# Altium PCB buzz_pump_led.PcbDoc
Units mil, origin at the board's own origin, x right, y up, seen from the top; angles counter-clockwise.
Board outline 3937.01 x 3937.01 mil, 2 copper layers (Top Layer, Bottom Layer); 59 components, 31 nets, 139 pads, 57 vias.
Unrouted connection lines stored in the file: 41.
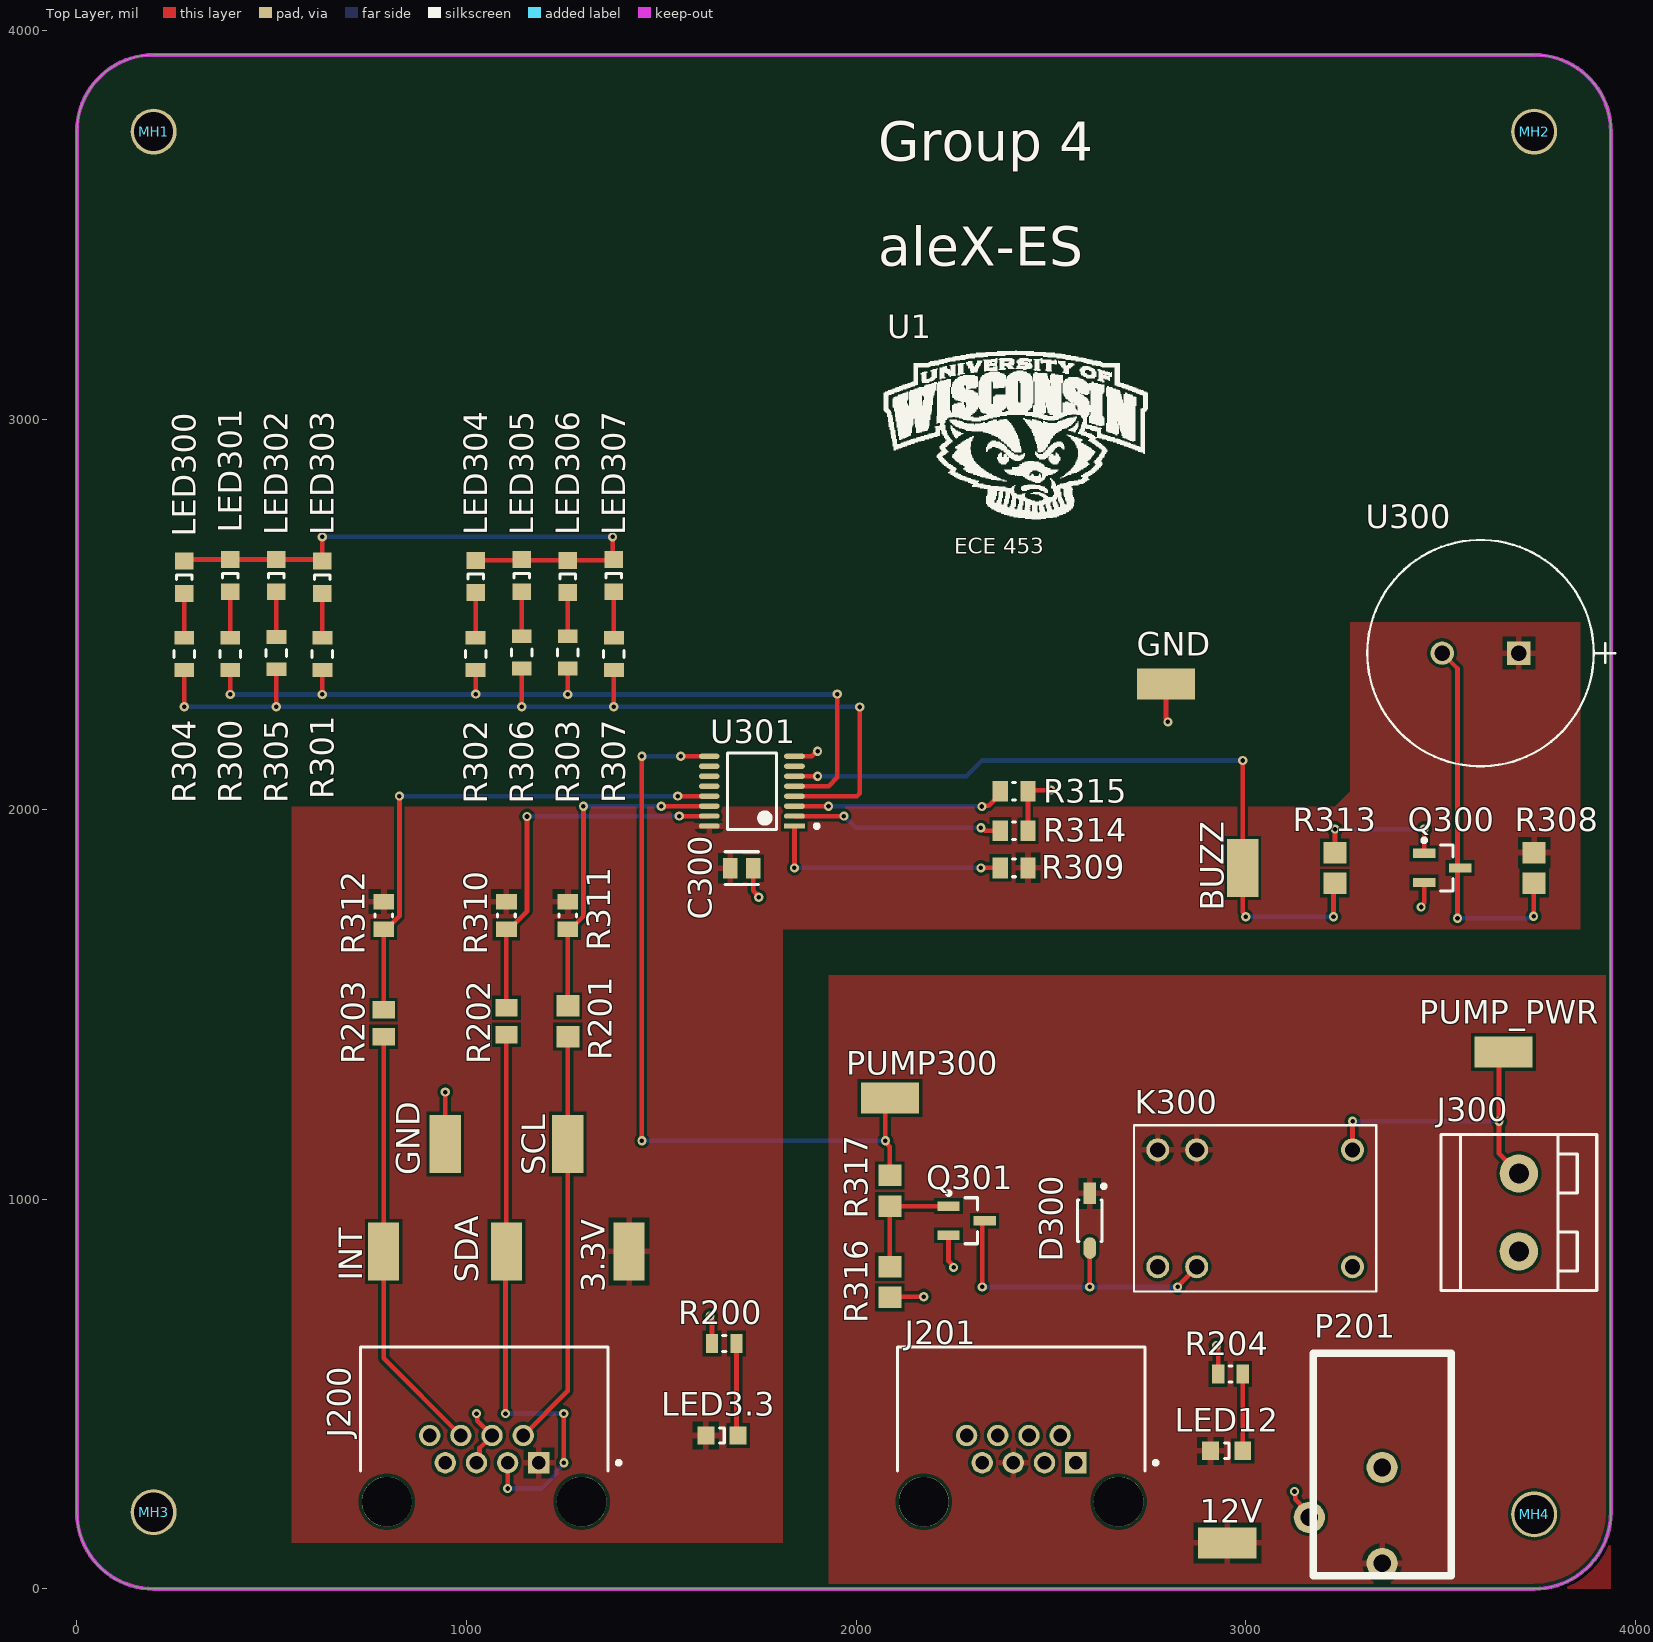
[diagram p0: Top Layer view]
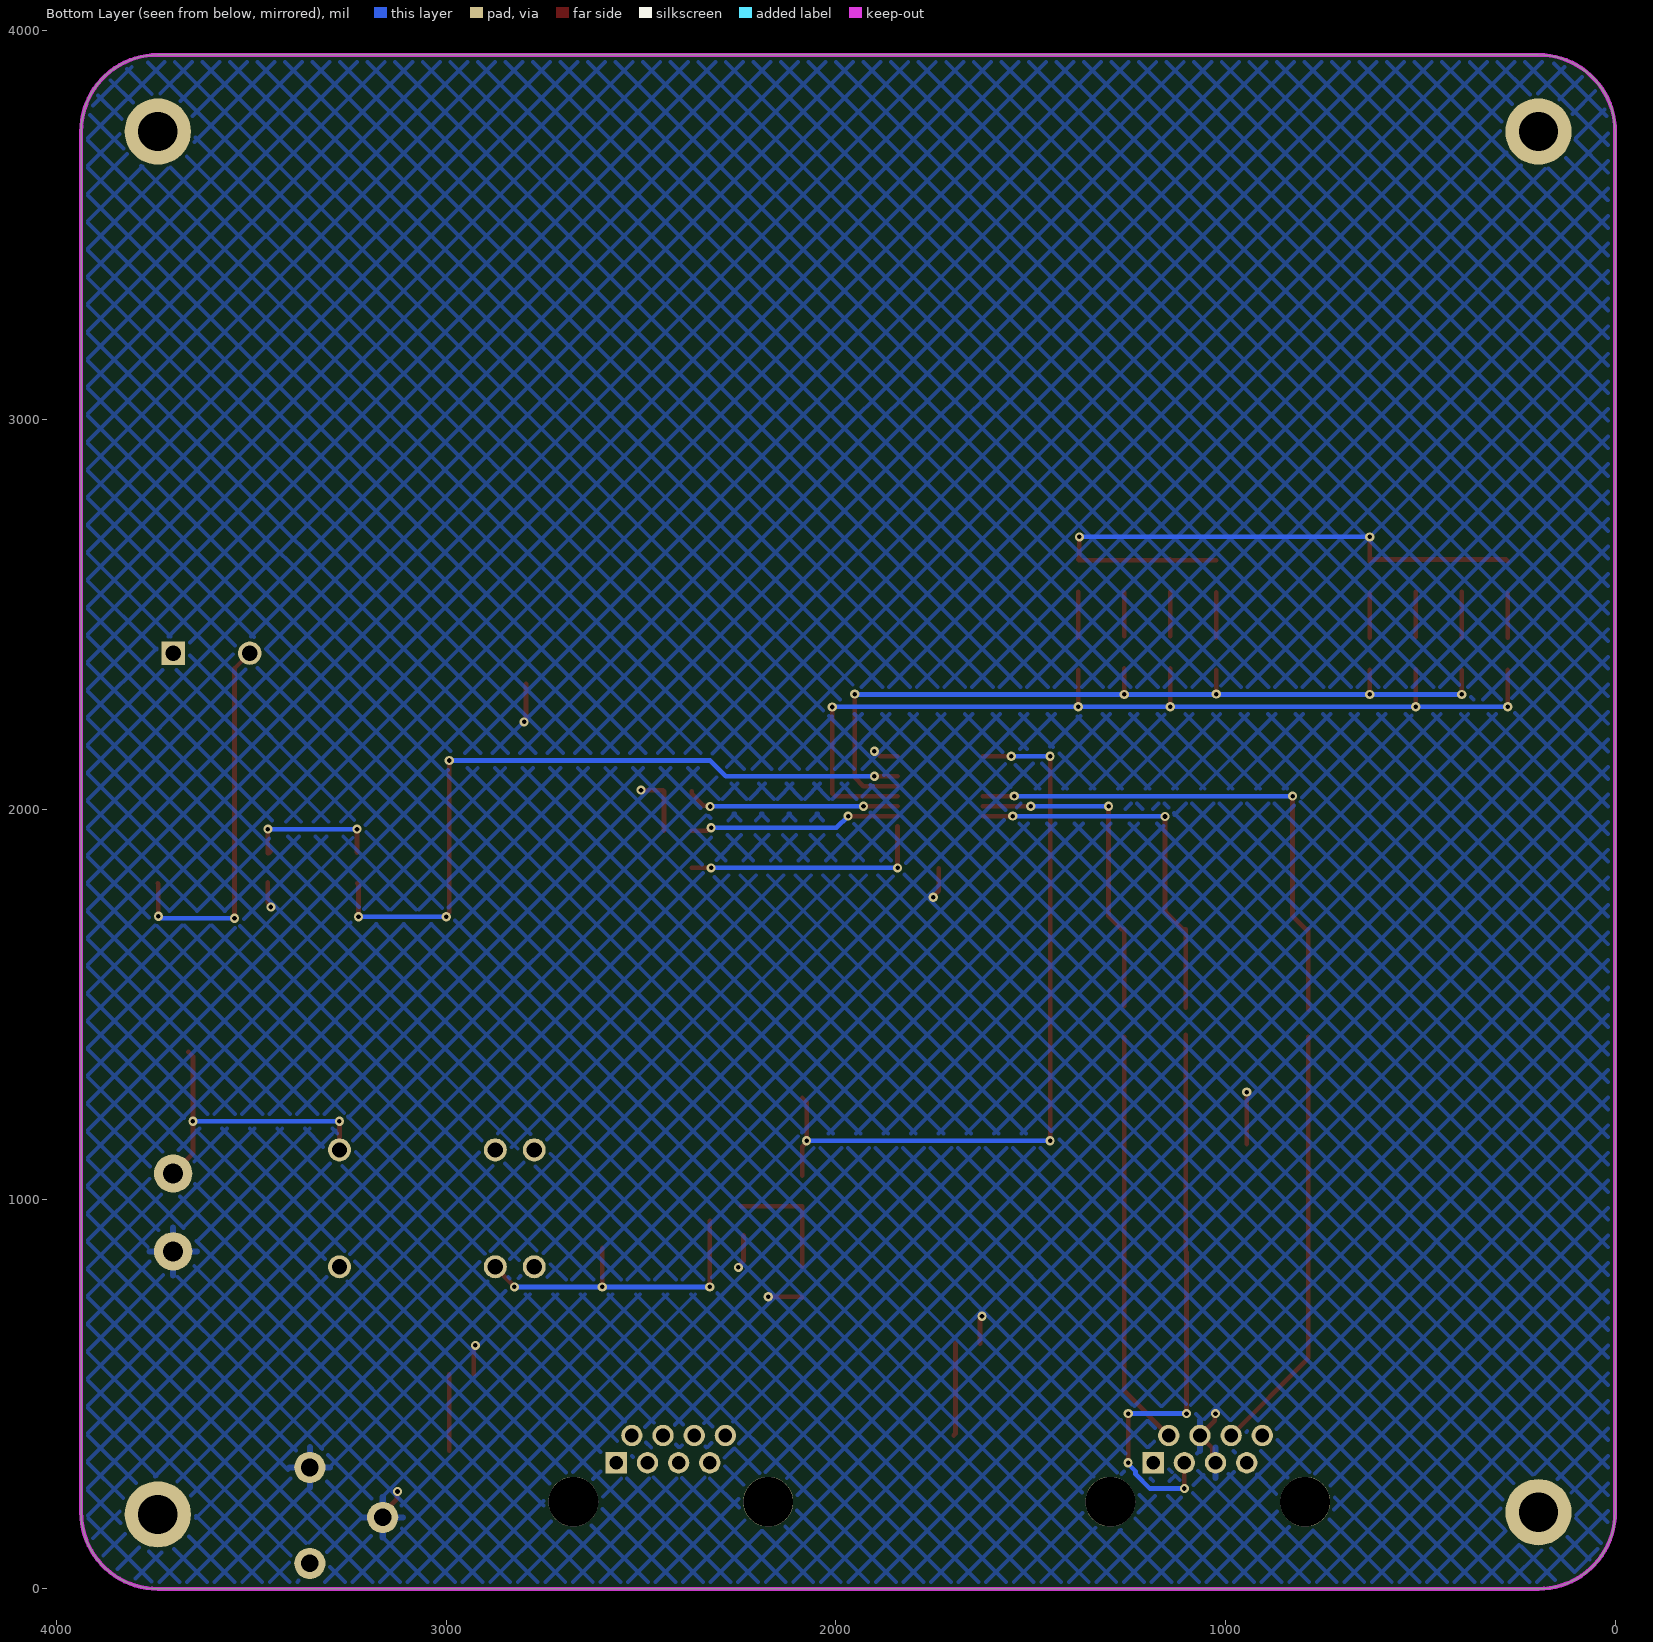
[diagram p1: Bottom Layer view, seen from below]
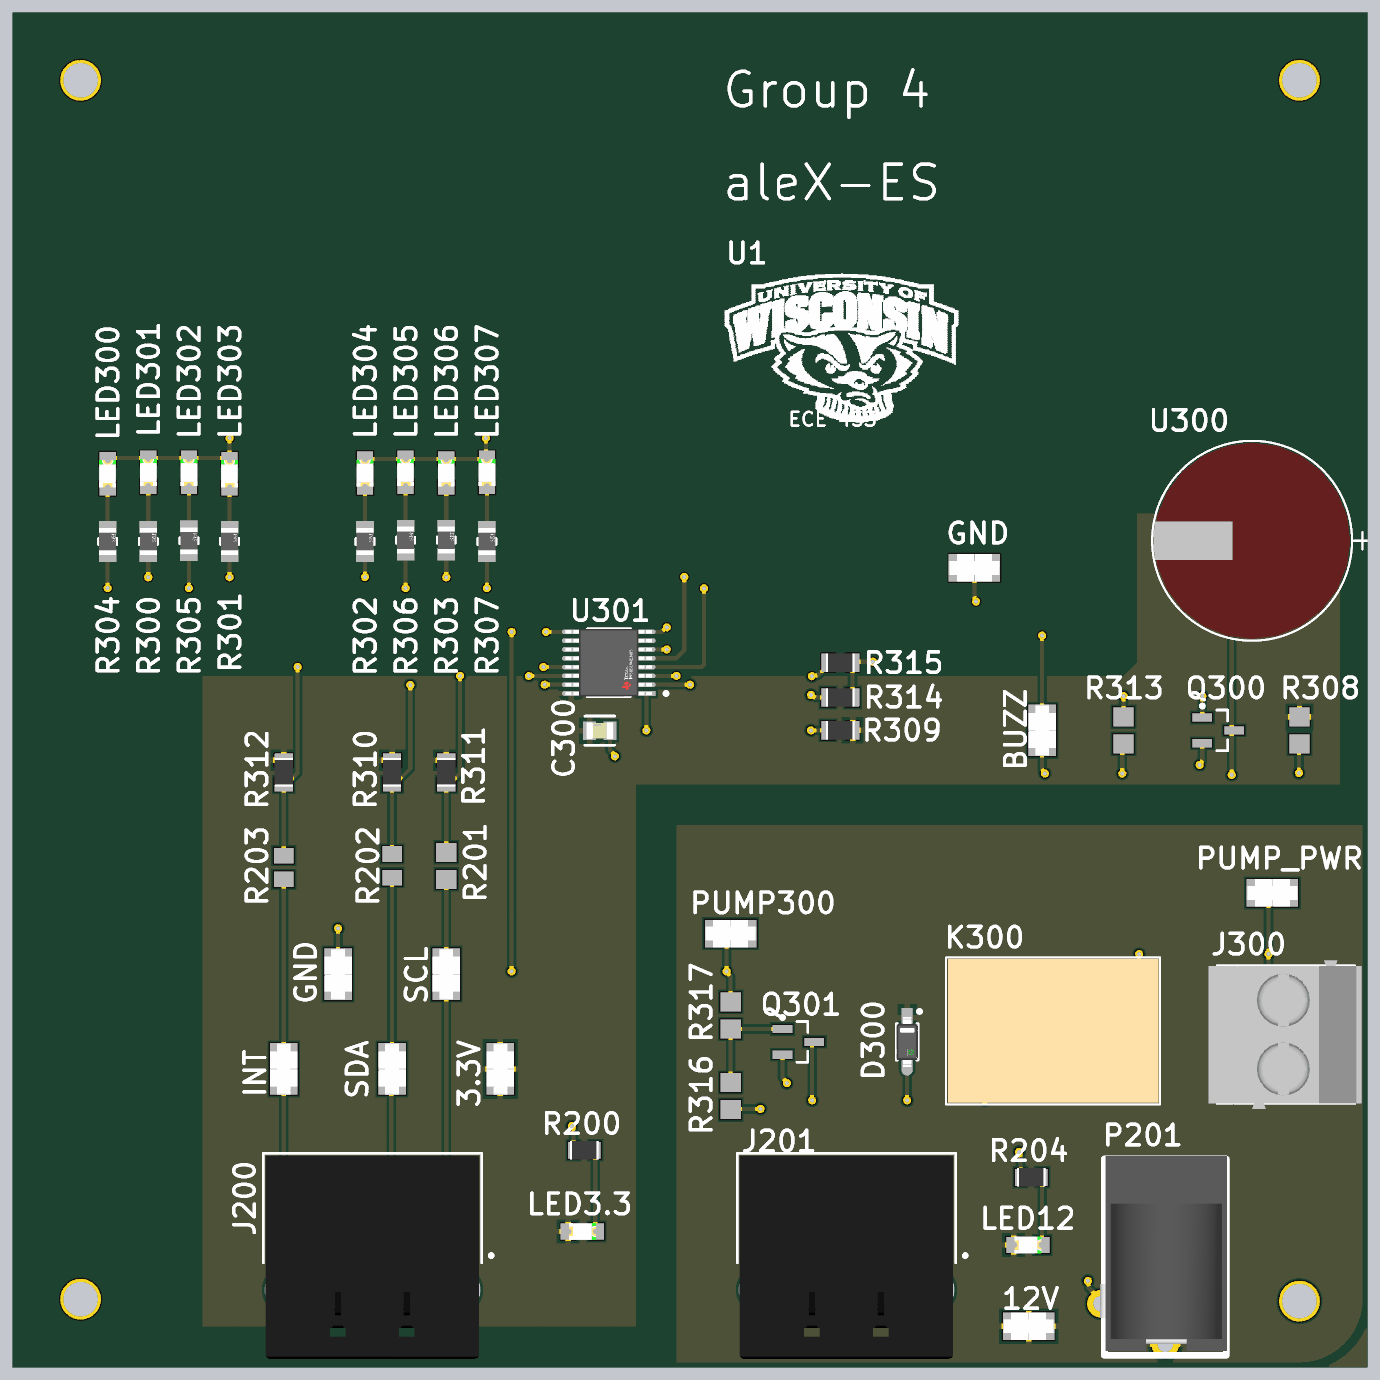
[diagram p2: 3D render of the assembled board from above, using the file's embedded part models]

## Layer stack, top to bottom
Top Solder: solder mask 0.4, Solder Resist, Dk 3.5
Top Layer: signal copper 1.4
Dielectric1: dielectric 12.6, FR-4, Dk 4.8
Bottom Layer: signal copper 1.4
Bottom Solder: solder mask 0.4, Solder Resist, Dk 3.5

## Board outline
0,196.85 ccw(c196.85,196.85) 196.85,0 3740.16,0 ccw(c3740.16,196.85) 3937.01,196.85 3937.01,3740.16 ccw(c3740.16,3740.16) 3740.16,3937.01 196.85,3937.01 ccw(c196.85,3740.16) 0,3740.16

## Design rules (kind name [scope] priority, off if disabled: settings)
Clearance Polygon_Clearance [All vs InPolygon] p1: gap=7.87 ignorepadtopadclearanceinfootprint=FALSE
Clearance [All] p2: gap=7.87 ignorepadtopadclearanceinfootprint=TRUE
ComponentClearance [InComponent('U3')] p1: gap=0 collisioncheckmode=3 verticalgap=10 showdistances=FALSE
Height [All] p1: minheight=0 maxheight=2952.76 prefheight=500
HoleSize [All] p1: absolutevalues=TRUE maxlimit=250 minlimit=11.81 maxpercent=80.000 minpercent=20.000
MinimumAnnularRing [All] p1: minimumring=5.91
MinimumSolderMaskSliver [All] p1: minsoldermaskwidth=8.66
NetAntennae NetAntennae_5.0V [InNet('5.0V')] p1: netantennaetolerance=0
NetAntennae NetAntennae_3.3V [InNet('3.3V')] p2: netantennaetolerance=0
PlaneClearance [All] p1: clearance=11.81
PlaneConnect [All] p1: planeconnectstyle=Relief reliefexpansion=11.81 reliefentries=4 reliefconductorwidth=11.81 reliefairgap=11.81
PolygonConnect ViaConnect [All vs IsVia] p1: connectstyle=Direct reliefconductorwidth=15 reliefentries=4 polygonreliefangle="90 Angle" airgapwidth=10
PolygonConnect [All] p2: connectstyle=Relief reliefconductorwidth=15.75 reliefentries=4 polygonreliefangle="90 Angle" airgapwidth=11.81
RoutingVias [All] p1: holewidth=11.81 width=23.62 viastyle="Through Hole" minholewidth=11.81 minwidth=23.62 maxholewidth=196.85 maxwidth=393.7
SilkToSilkClearance [All] p1: silktosilkclearance=0
SilkToSolderMaskClearance [IsPad] p1: minsilkscreentomaskgap=0 clearancetoexposedcopper=TRUE
SolderMaskExpansion [All] p1: expansion=4 istentingtop=FALSE
UnConnectedPin [All] p1:
Width [All] p1: maxlimit=393.7 minlimit=7.87 preferedwidth=23.62
21 further rules are at their usual default settings.

## Classes and differential pairs
component class 04_Mechanical: MH1 MH2 MH3 MH4 U1

## Components (designator, comment, footprint, x,y, rotation, side; value= is the part's Value field where it differs from the comment)
3.3V "5019" KSTN-5019_V 1417.32,866.14 r90 top (schematic designator 200)
12V "5019" KSTN-5019_V 2952.76,118.11 r0 top (schematic designator 201)
BUZZ "5019" KSTN-5019_V 2992.13,1850.39 r90 top (schematic designator BUZZ300)
C300 "C0805C104K5RACTU" FP-C0805C-DN-MFG 1706.31,1849.61 r0 top value=100nF
D300 "SM5817PL-TP" On_Semiconductor_425-04_IPC_A 2599.68,944.88 r270 top
GND "5019" KSTN-5019_V 2795.28,2322.83 r180 top
GND "5019" KSTN-5019_V 945.51,1141.73 r90 top (schematic designator GND200)
INT "5019" KSTN-5019_V 787.4,866.14 r90 top (schematic designator INT200)
J200 "RJHSE-5080" FP-RJHSE-5080-MFG 1045.51,318.7 r0 top
J201 "RJHSE-5080" FP-RJHSE-5080-MFG 2423.46,318.7 r0 top
J300 "Pump Power" PHOENIX2X0.2 3700.79,966.14 r90 top
K300 "J1021AS512VDC.45" RELAY6_J102_CRS 3274.02,1126.77 r270 top
LED3.3 "150080GS75000" 0805_A 1655.51,393.7 r180 top (schematic designator LED200)
LED12 "150080GS75000" 0805_A 2950.79,354.33 r180 top (schematic designator LED201)
LED300 "150080RS75000" 0805_A 275.59,2596.46 r270 top
LED301 "150080RS75000" 0805_A 393.7,2600.39 r270 top
LED302 "150080RS75000" 0805_A 511.81,2600.39 r270 top
LED303 "150080RS75000" 0805_A 629.92,2596.46 r270 top
LED304 "150080RS75000" 0805_A 1023.62,2598.43 r270 top
LED305 "150080RS75000" 0805_A 1141.73,2600.39 r270 top
LED306 "150080RS75000" 0805_A 1259.84,2598.43 r270 top
LED307 "150080RS75000" 0805_A 1377.95,2600.39 r270 top
MH1 "MHOLE_2_55MM" MHOLE_2_55MM 196.85,3740.16 r0 top locked
MH2 "MHOLE_2_55MM" MHOLE_2_55MM 3740.16,3740.16 r0 top locked
MH3 "MHOLE_2_55MM" MHOLE_2_55MM 196.85,196.85 r0 top locked
MH4 "MHOLE_2_55MM" MHOLE_2_55MM 3740.16,191.24 r0 top locked
P201 "PJ-102" PJ-102 3350,65.56 r0 top value=CP-102AD
PUMP300 "5019" KSTN-5019_V 2086.61,1259.84 r180 top
PUMP_PWR "5019" KSTN-5019_V 3661.42,1377.95 r0 top (schematic designator PUMP_PWR300)
Q300 "2N3904" SOT-23_M 3503.94,1850.39 r0 top
Q301 "2N3904" SOT-23_M 2283.46,944.88 r0 top
R200 "RC0805FR-07330RL" RESC2013X60X35LL10T20 1661.42,629.92 r180 top value=330R
R201 "ERJ-6GEY0R00V" RES_0805 1259.84,1456.69 r90 top value=0R
R202 "ERJ-6GEY0R00V" RESC2013X70X40NL20T20 1102.36,1456.69 r90 top value=0R
R203 "ERJ-6GEY0R00V" RESC2013X70X40NL20T20 787.4,1451.77 r90 top value=0R
R204 "RC0805FR-07330RL" RESC2013X60X35LL10T20 2960.63,551.18 r180 top value=330R
R300 "RMCF0805JT510R" FP-RMCF0805-MFG 393.7,2399.61 r90 top
R301 "RMCF0805JT510R" FP-RMCF0805-MFG 629.92,2399.61 r90 top
R302 "RMCF0805JT510R" FP-RMCF0805-MFG 1023.62,2399.61 r90 top
R303 "RMCF0805JT510R" FP-RMCF0805-MFG 1259.84,2403.54 r90 top
R304 "RMCF0805JT510R" FP-RMCF0805-MFG 275.59,2399.61 r90 top
R305 "RMCF0805JT510R" FP-RMCF0805-MFG 511.81,2401.57 r90 top
R306 "RMCF0805JT510R" FP-RMCF0805-MFG 1141.73,2403.54 r90 top
R307 "RMCF0805JT510R" FP-RMCF0805-MFG 1377.95,2399.61 r90 top
R308 "10K" RES_0805 3740.16,1850.39 r90 top value=1K
R309 "RC0805FR-0710KL" RESC2013X60X35NL10T20 2405.51,1850.39 r0 top value=10kR
R310 "RC0805FR-0710KL" RESC2013X60X35NL10T20 1102.36,1728.35 r90 top value=10kR
R311 "RC0805FR-0710KL" RESC2013X60X35NL10T20 1259.84,1728.35 r90 top value=10kR
R312 "RC0805FR-0710KL" RESC2013X60X35NL10T20 787.4,1728.35 r90 top value=10kR
R313 "10K" RES_0805 3228.35,1850.39 r90 top value=1K
R314 "RC0805FR-0710KL" RESC2013X60X35NL10T20 2405.51,1945.87 r180 top value=10kR
R315 "RC0805FR-0710KL" RESC2013X60X35NL10T20 2405.51,2047.24 r180 top value=10kR
R316 "10K" RES_0805 2086.61,787.4 r270 top
R317 "10K" RES_0805 2086.61,1021.65 r270 top value=1K
SCL "5019" KSTN-5019_V 1259.84,1141.73 r90 top (schematic designator SCL200)
SDA "5019" KSTN-5019_V 1102.36,866.14 r90 top (schematic designator SDA200)
U1 "Bucky" WalkingBucky 2362.2,2677.17 r0 top
U300 "PS1440P02BT" PS1440P02BT_TDK 3700.79,2401.57 r180 top
U301 "TCA9534PWR" FP-PW0016A-IPC_C 1732.28,2047.24 r180 top

## Footprints (in the part's own frame and the unit in brackets; to place one, negate y for a bottom-side part, rotate by r counter-clockwise, add the part's x,y. Pads: shape width x height; smd on the part's side, far side on the other; paste and mask are expansions set on the pad)
0805_A [mm]
  rect 1.1x1.2 smd: 1(-1.05,0) 2(1.05,0)
  silkscreen extent -0.15,-0.5 0.15,0.5, body extent -1,-0.62 1,0.63, height 0.68
FP-C0805C-DN-MFG [mm]
  rect 0.95x1.35 smd paste+0 mask+0: 1(-0.75,0) 2(0.75,0)
  silkscreen extent -1.1,-1.07 1.1,1.07, body extent -1.4,-0.85 1.4,0.85, height 0.25
FP-PW0016A-IPC_C [mm]
  rect 1.355x0.341 smd paste+0 mask+0: 1(-2.775,2.275)
  rrect100% 1.355x0.341 smd paste+0 mask+0: 2(-2.775,1.625) 3(-2.775,0.975) 4(-2.775,0.325) 5(-2.775,-0.325) 6(-2.775,-0.975) 7(-2.775,-1.625) 8(-2.775,-2.275) 9(2.775,-2.275) 10(2.775,-1.625) 11(2.775,-0.975) 12(2.775,-0.325) 13(2.775,0.325) 14(2.775,0.975) 15(2.775,1.625) 16(2.775,2.275)
  silkscreen extent -4.35,-2.5 1.6,2.5, body extent -3.55,-2.6 3.55,2.6, height 0.25
FP-RJHSE-5080-MFG [mm]
  rect 1.39x1.39 hole 0.89 paste-1000 mask+0: 1(3.556,0.127)
  round 1.39 hole 0.89 paste-1000 mask+0: 2(2.54,1.905) 3(1.524,0.127) 4(0.508,1.905) 5(-0.508,0.127) 6(-1.524,1.905) 7(-2.54,0.127) 8(-3.556,1.905)
  round 3.25 hole 3.25 unplated paste-1000 mask+0: ""(-6.35,-2.413) ""(6.35,-2.413)
  silkscreen extent -8.06,-0.41 8.89,7.68, body extent -8.16,-7.78 8.16,7.78, height 0.25
FP-RMCF0805-MFG [mm]
  rect 0.9x1.3 smd paste+0 mask+0: 1(-1.05,0) 2(1.05,0)
  silkscreen extent -0.23,-0.67 0.23,0.67, body extent -1.6,-0.77 1.6,0.77, height 0.25
KSTN-5019_V [mm]
  rect 3.8x2.03 smd: 1(0,0)
  body extent -1.9,-1.01 1.9,1.02, height 2.29
MHOLE_2_55MM [mm]
  round 3 / inner round 4.572 / far side round 4.318 hole 2.55: 1(0,0)
On_Semiconductor_425-04_IPC_A [mm]
  rect 1.408x0.822 smd paste+0 mask+0: 1(-1.78,0)
  rrect100% 1.408x0.822 smd paste+0 mask+0: 2(1.78,0)
  silkscreen extent -2.37,-0.8 1.35,1.04, body extent -2.98,-1.3 2.98,1.3, height 0.25
PHOENIX2X0.2 [mm]
  round 2.5 hole 1.295: 1(-2.54,0) 2(2.54,0)
  silkscreen extent -5.08,-5.08 5.08,5.08, body extent -5.48,-5.59 5.48,5.71, height 18.05
PJ-102 [mil]
  round 80 hole 45: 1(0,0) 2(0,246.05) 3(-187,118.1)
  silkscreen extent -177,-31 177,539, body extent -190,-20 180,547, height 435
PS1440P02BT_TDK [mil]
  rect 60x60 / inner round 60 / far side rect 60x60 hole 40 paste-30 mask+0: 1(0,0)
  round 60 hole 40 paste-30 mask+0: 2(196.85,0)
  silkscreen extent -247,-290 389,290, body extent -187,-285 385,285, height 336
RELAY6_J102_CRS [mil]
  round 59 / inner round 60 / far side round 59 hole 39 paste-29.5 mask+0: 1(0,0) 2(0,-400) 3(0,-500) 4(300,-500) 5(300,-400) 6(300,0)
  silkscreen extent -63,-561 364,61, body extent -59,-556 359,56, height 457
RES_0805 [mm]
  rect 1.4x1.5 smd: 1(-1,0) 2(1,0)
  body extent -1.07,-0.7 1.07,0.7, height 0.7
RESC2013X60X35LL10T20 [mm]
  rect 0.8x1.25 smd: 1(-0.8,0) 2(0.8,0)
  silkscreen extent -0.1,-0.53 0.1,0.53, body extent -1.05,-0.67 1.05,0.68, height 0.6
RESC2013X60X35NL10T20 [mm]
  rect 1x1.35 smd: 1(-0.9,0) 2(0.9,0)
  silkscreen extent -0.1,-0.58 0.1,0.58, body extent -1.05,-0.68 1.05,0.67, height 0.6
RESC2013X70X40NL20T20 [mm]
  rect 1.15x1.45 smd: 1(-0.875,0) 2(0.875,0)
  body extent -1.1,-0.72 1.1,0.72, height 0.7
SOT-23_M [mm]
  rect 1.45x0.6 smd: 1(-1.175,0.95) 2(-1.175,-0.95) 3(1.175,0)
  silkscreen extent -1.3,-1.5 0.7,1.92, body extent -0.7,-1.5 0.7,1.5, height 1.1
WalkingBucky [mil]
  silkscreen extent -292,69 386,501

## Part data
3.3V 12V BUZZ GND GND INT PUMP300 PUMP_PWR SCL SDA: library part CMP-1672-00008-1, "Test Point, 1 Position SMD, RoHS, Tape and Reel", Manufacturer="Keystone Electronics", Package Quantity=1, Supplier Part Number=59Y8500, Body Material=Bronze, Category=Connectors, ComponentLink1Description=https://datasheet.ciiva.com/14848/m60-2p61-14848437.pdf?src-supplier=Digi-Key, ComponentLink1URL=https://datasheet.ciiva.com/14848/m60-2p61-14848437.pdf?src-supplier=Digi-Key, ComponentLink2Description=https://datasheet.ciiva.com/14848/m60-2p61-14848438.pdf?src-supplier=Digi-Key, ComponentLink2URL=https://datasheet.ciiva.com/14848/m60-2p61-14848438.pdf?src-supplier=Digi-Key, ComponentLink3Description=https://datasheet.ciiva.com/14848/m60-2p61-14848439.pdf?src-supplier=Digi-Key, ComponentLink3URL=https://datasheet.ciiva.com/14848/m60-2p61-14848439.pdf?src-supplier=Digi-Key, ComponentLink4Description=https://datasheet.ciiva.com/16318/m60-2p61-16318395.pdf?src-supplier=Future+Electronics, ComponentLink4URL=https://datasheet.ciiva.com/16318/m60-2p61-16318395.pdf?src-supplier=Future+Electronics, ComponentLink5Description=https://datasheet.ciiva.com/16885/70182998-16885945.pdf?src-supplier=Allied+Electronics, ComponentLink5URL=https://datasheet.ciiva.com/16885/70182998-16885945.pdf?src-supplier=Allied+Electronics, Contact Material=Bronze, Contact Plating=Silver, Height=0.09inch, Lead Free="Lead Free", Manufacturer Part Number=5019, Material=Bronze, Mounting Technology="Surface Mount,PCB", Packaging="Tape and Reel", Pins=1, Plating=Silver, Pricing="1=0.411, 10=0.389, 25=0.285, 50=0.279, 100=0.273, 250=0.246 (USD)", Reach SVHC Compliant=No, RoHS=Yes, RoHS Compliant=Yes, Series=5019, Stock=11269, Supplier=Newark, Termination=SMD/SMT
C300: library part CMP-2007-00279-2, "CAP CER 0.1UF 50V X7R 0805", Case Code (Imperial)=0805, Case Code (Metric)=2012, Dielectric=X7R, Manufacturer=KEMET, Max Operating Temperature=125°C, Min Operating Temperature=-55°C, Package Quantity=4000, Supplier Part Number=19C6015, Tolerance=10%, Voltage=500V, Voltage Rating=50V, Case/Package=0805, Category="Ceramic Capacitors", ComponentLink1Description=https://datasheet.ciiva.com/32431/slceramic-chip-condensers-e-32431755.pdf?src-supplier=Distrelec, ComponentLink1URL=https://datasheet.ciiva.com/32431/slceramic-chip-condensers-e-32431755.pdf?src-supplier=Distrelec, ComponentLink2Description=Datasheet, ComponentLink2URL=https://content.kemet.com/datasheets/KEM_C1003_C0G_SMD.pdf, ComponentLink3Description=https://datasheet.ciiva.com/28682/1851736-28682232.pdf?src-supplier=Element14, ComponentLink3URL=https://datasheet.ciiva.com/28682/1851736-28682232.pdf?src-supplier=Element14, Construction=Flat, Depth=1.25mm, Height=0.9mm, Lead Pitch=0.75mm, Length=2mm, Manufacturer Part Number=C0805C104K5RACTU, Mounting Technology="Surface Mount,PCB", Packaging="Tape and Reel", Pins=2, Pricing="1=0.024, 25=0.024, 50=0.024, 100=0.024, 250=0.024, 500=0.024, 1000=0.024 (USD)", Radiation Hardening=No, Reach SVHC Compliant=No, RoHS=Yes, RoHS Compliant=Yes, Series="SMD Comm X7R", Stock=3382390, Supplier=Newark, Termination=SMD/SMT, Voltage Rating (DC)=50V, Width=1.2mm
D300: "DIODE SCHOTTKY 20V 1A SOD123FL", Average Rectified Current=1A, Forward Voltage=450mV, Manufacturer 2=MCC, Max Operating Temperature=125°C, Max Reverse Voltage (DC)=20V, Max Surge Current=30A, Min Operating Temperature=-65°C, Package Quantity=1, Supplier Part Number 1=SM5817PL-TPMSCT-ND, Category="Rectifier Diodes", ComponentLink1Description=https://datasheet.ciiva.com/15200/getdatasheetpartid-487494-15200581.pdf?src-supplier=Verical, ComponentLink1URL=https://datasheet.ciiva.com/15200/getdatasheetpartid-487494-15200581.pdf?src-supplier=Verical, ComponentLink2Description=https://datasheet.ciiva.com/912/sm5817pl-sm5819plsod-123fl-912827.pdf?src-supplier=Digi-Key, ComponentLink2URL=https://datasheet.ciiva.com/912/sm5817pl-sm5819plsod-123fl-912827.pdf?src-supplier=Digi-Key, Element Configuration=Single, Manufacturer Part Number 2=SM5817PL-TP, Mount="Surface Mount", Number of Pins=2, Packaging="Tape and Reel", Peak Non-Repetitive Surge Current=30A, Pricing 2="1=0.46000, 10=0.31900, 100=0.16110, 500=0.13144, 1000=0.09752 (USD)", Radiation Hardening=No, Reverse Voltage=20V, RoHS=Yes, RoHS Compliant=Yes, Stock 2=178040, Supplier 1=Digi-Key
J200 J201: library part CMP-02366-000003-1, "CONN MOD JACK 8P8C R/A UNSHLD", Contact Resistance=20mR, Current Rating=1.5A, Manufacturer=Amphenol, Max Voltage Rating (AC)=125V, Package=CONN_MOD_JACK, Supplier Part Number=28T0105, Temperature="-55°C to +85°C", Temperature Range High=+85°C, Temperature Range Low=-55°C, Automotive=No, Category=Conn, ComponentLink1Description=https://datasheet.ciiva.com/7629/1682821-7629402.pdf?src-supplier=Element14, ComponentLink1URL=https://datasheet.ciiva.com/7629/1682821-7629402.pdf?src-supplier=Element14, ComponentLink2Description=Datasheet, ComponentLink2URL=https://cdn.amphenol-icc.com/media/wysiwyg/files/documentation/datasheet/inputoutput/io-modjack-rjhse.pdf, ComponentLink3Description=https://datasheet.ciiva.com/685/rjhse5080-685586.pdf?src-supplier=Digi-Key, ComponentLink3URL=https://datasheet.ciiva.com/685/rjhse5080-685586.pdf?src-supplier=Digi-Key, ComponentLink4Description=https://datasheet.ciiva.com/1432/1693748-1432448.pdf?src-supplier=Element14, ComponentLink4URL=https://datasheet.ciiva.com/1432/1693748-1432448.pdf?src-supplier=Element14, ComponentLink5Description=https://datasheet.ciiva.com/15171/getdatasheetpartid-643190-15171163.pdf?src-supplier=Verical, ComponentLink5URL=https://datasheet.ciiva.com/15171/getdatasheetpartid-643190-15171163.pdf?src-supplier=Verical, Conn Gender=Female, Conn Orientation="Right Angle", Connector Type=RJ45, Contact Material=Gold,Nickel, Contact Plating=Gold, Depth=14.99mm, Device Class L1=Connectors, Device Class L2="Modular / Ethernet Connectors", Device Class L3=unset, Digikey Description="CONN MOD JACK 8P8C R/A UNSHLD", Footprint Url=https://cdn.amphenol-icc.com/media/wysiwyg/files/drawing/rjhse5080.pdf?__cf_chl_jschl_tk__=e349db0bbbb6188a39347cd5e541b92fa02c9719-1587748343-0-AW7tChdeHzRPLX9gSWj7WrKaXQoY9BsmT9Ek0h-T62M9y3Rs9iypFcOtkzb-6sGYQEjFE-jcoNciDETCOZrh1rYyOesac5SvYLoLwHIsHvF4AKBlx-MXmfZUVk9OTTJLqyQq2qMm0PFRLJpNcK0nrKResqOniRSYixG2sPTmOPraH-ULJFBDL602CHqcI9KKBgTq90Jh1OL2Td4moJ99rFsJRJ1Tk_uoxGe8ublcP_ARu-uLpWcQrBcwOcHDTAwL29DAwVaqcH7ta8Ks7WMlHmVl_pILeEDwT0bE9vu5Pa5S3PtNRF1leuFkgi_FMbUxTDulc5xzbXSfng8srUIV1lWXny5nx1fZJEUa_w97yKjffzBMxiWLWVN-V7-uqAaPbyv_m-wRyw5O25OZNyJOeGU, Gender=Female, Height=0.535inch, Is Female=yes, Lead Free=Yes, Length=15.75mm, Manufacturer Part Number=RJHSE-5080, Max Current Rating=1.5A, Mounting Technology="Through Hole,Panel", Mouser Description="Modular Connectors / Ethernet Connectors R/A RJ45 NONSHIELDED 8 CONT NO LEDS", Number of Contacts=8, Number of Ports=1, Number of Positions=8, Number of Positions Loaded=8, Octopart=https://octopart.com/rjhse-5080-amphenol-45060, Orientation="Right Angle", Packaging=Rail/Tube, Pitch=1.02mm, Pricing="1=0.966, 10=0.854, 25=0.808, 50=0.777, 100=0.748, 250=0.688, 500=0.627, 1000=0.568 (USD)", Radiation Hardening=No, Reach SVHC Compliant=Unknown, RoHS=TRUE, RoHS Compliant=Yes, Stock=8640, Supplier=Newark, Termination=Solder, Voltage Rating=125V, Voltage Rating (DC)=125V
J300: library part 2-Pin, "2~24 Poles, Screw Type, Horizontal, 5.08 Pitch, 26~14 (AWG), Terminal Block Connector", Manufacturer="CUI Devices", Manufacturer Part Number=TB006-508-02BE, Supplier Part Number=102-6191-ND, Category="Terminal Blocks", ComponentLink1Description=https://datasheet.ciiva.com/709/eng-cd-640456-w1-709680.pdf?src-supplier=Digi-Key, ComponentLink1URL=https://datasheet.ciiva.com/709/eng-cd-640456-w1-709680.pdf?src-supplier=Digi-Key, ComponentLink2Description=https://datasheet.ciiva.com/3118/eng-ds-82056-mta-0608-3118497.pdf?src-supplier=Avnet, ComponentLink2URL=https://datasheet.ciiva.com/3118/eng-ds-82056-mta-0608-3118497.pdf?src-supplier=Avnet, ComponentLink3Description=https://datasheet.ciiva.com/16401/eng-ds-82056-mta-0608-16401289.pdf?src-supplier=Future+Electronics, ComponentLink3URL=https://datasheet.ciiva.com/16401/eng-ds-82056-mta-0608-16401289.pdf?src-supplier=Future+Electronics, ComponentLink4Description=https://datasheet.ciiva.com/25617/0900766b80027008-25617244.pdf?src-supplier=RSComponents, ComponentLink4URL=https://datasheet.ciiva.com/25617/0900766b80027008-25617244.pdf?src-supplier=RSComponents, ComponentLink5Description=https://datasheet.ciiva.com/14156/04384301-14156820.pdf?src-supplier=Distrelec, ComponentLink5URL=https://datasheet.ciiva.com/14156/04384301-14156820.pdf?src-supplier=Distrelec, ComponentLink6Description=https://datasheet.ciiva.com/11746/0900766b80eb7fdd-11746365.pdf?src-supplier=RSComponents, ComponentLink6URL=https://datasheet.ciiva.com/11746/0900766b80eb7fdd-11746365.pdf?src-supplier=RSComponents, ComponentLink7Description=https://datasheet.ciiva.com/7128/1866390-7128742.pdf?src-supplier=Newark, ComponentLink7URL=https://datasheet.ciiva.com/7128/1866390-7128742.pdf?src-supplier=Newark, ComponentLink8Description=https://datasheet.ciiva.com/16505/eng-ds-82056-mta-0608-16505419.pdf?src-supplier=Avnet+Asia, ComponentLink8URL=https://datasheet.ciiva.com/16505/eng-ds-82056-mta-0608-16505419.pdf?src-supplier=Avnet+Asia, Pricing 1="1=0.86, 10=0.472, 25=0.3524, 50=0.3142, 100=0.308, 250=0.27108, 500=0.24644, 1000=0.2218, 5000=0.16635 (USD)", RoHS=Yes, Stock 1=50889, Supplier=Digi-Key
K300: "No Description Available", Mfr_Name="CIT Relay & Switch", Copyright="Copyright (C) 2023 Ultra Librarian. All rights reserved.", Manufacturer_Part_Number=J1021AS512VDC.45, RefDes=RefDes, Type=DEV
LED3.3 LED12: library part CMP-1426-00007-1, "SMD mono-color Chip LED, WL-SMCW, Green", Case Code (Imperial)=0805, Case Code (Metric)=2012, Color=Green, Forward Current=30mA, Forward Voltage=3.2V, Lens Color=Colorless, Manufacturer="Wuerth Elektronik", Manufacturer 1="Wurth Electronics", Max Operating Temperature=85°C, Min Operating Temperature=-40°C, Package Quantity=4000, Supplier Part Number=95W3800, Supplier Part Number 1=732-4983-1-ND, Test Current=20mA, Case/Package=0805, Category=LEDs, ComponentLink1Description="Manufacturer URL", ComponentLink1URL=http://www.we-online.com, ComponentLink2Description=Datasheet, ComponentLink2URL=http://katalog.we-online.com/led/datasheet/150080GS75000.pdf, ComponentLink3Description=https://datasheet.ciiva.com/29563/150080gs75000-29563008.pdf?src-supplier=Digi-Key, ComponentLink3URL=https://datasheet.ciiva.com/29563/150080gs75000-29563008.pdf?src-supplier=Digi-Key, ComponentLink4Description=https://datasheet.ciiva.com/29279/759434-da-01-en-chipled-0805-w-kl-gruen-150080gs75000-29279039.pdf?src-supplier=Conrad, ComponentLink4URL=https://datasheet.ciiva.com/29279/759434-da-01-en-chipled-0805-w-kl-gruen-150080gs75000-29279039.pdf?src-supplier=Conrad, Dominant Wavelength=520nm, Height=0.7mm, Length=2mm, Lens Size=1.25mm, Lens Style=Clear,Rectangular, Lens Transparency=Clear, Luminous Intensity=450mcd, Manufacturer Part Number=150080GS75000, Manufacturer Part Number 1=150080GS75000, Mount="Surface Mount", Mounting Technology="Surface Mount", PackageReference=0805_A, Packaging="Cut Tape", PartNumber=150080GS75000, Pricing="1=0.194, 5=0.194, 10=0.191, 25=0.186, 50=0.18, 100=0.154, 500=0.141 (USD)", Pricing 1="1=0.19000, 50=0.17600, 100=0.15100, 500=0.13100 (USD)", REACH SVHC=Unknown, Reach SVHC Compliant=Unknown, RoHS=Yes, RoHS Compliant=Yes, Series=WL-SMCW, Stock=59977, Stock 1=95801, Supplier=Newark, Supplier 1=Digi-Key, Viewing Angle=140°, Wavelength=520nm, Width=1.25mm
LED300 LED301 LED302 LED303 LED304 LED305 LED306 LED307: library part CMP-1426-00011-1, "SMD mono-color Chip LED, WL-SMCW, Red", Case Code (Imperial)=0805, Case Code (Metric)=2012, Color=Red, Forward Current=30mA, Forward Voltage=2V, Lens Color=Colorless, Manufacturer="Wuerth Elektronik", Manufacturer 1="Wurth Electronics", Max Operating Temperature=85°C, Min Operating Temperature=-40°C, Package Quantity=4000, Supplier Part Number=95W3801, Supplier Part Number 1=732-4984-1-ND, Test Current=20mA, Case/Package=0805, Category=LEDs, ComponentLink1Description="Manufacturer URL", ComponentLink1URL=http://www.we-online.com, ComponentLink2Description=Datasheet, ComponentLink2URL=http://katalog.we-online.com/led/datasheet/150080RS75000.pdf, ComponentLink3Description=https://datasheet.ciiva.com/22656/150080rs75000-22656961.pdf?src-supplier=Element14, ComponentLink3URL=https://datasheet.ciiva.com/22656/150080rs75000-22656961.pdf?src-supplier=Element14, ComponentLink4Description=https://datasheet.ciiva.com/29279/759435-da-01-en-chipled-0805-w-kl-rot-150080rs75000-29279032.pdf?src-supplier=Conrad, ComponentLink4URL=https://datasheet.ciiva.com/29279/759435-da-01-en-chipled-0805-w-kl-rot-150080rs75000-29279032.pdf?src-supplier=Conrad, Dominant Wavelength=625nm, Height=0.7mm, Length=2mm, Lens Size=1.25mm, Lens Style=Clear,Rectangular, Lens Transparency=Clear, Luminous Intensity=150mcd, Manufacturer Part Number=150080RS75000, Manufacturer Part Number 1=150080RS75000, Mount="Surface Mount", Mounting Technology="Surface Mount", PackageReference=0805_A, Packaging="Tape and Reel", PartNumber=150080RS75000, Pricing="1=0.194, 5=0.194, 10=0.191, 25=0.186, 50=0.18, 100=0.154 (USD)", Pricing 1="1=0.19000, 50=0.17600, 100=0.15100, 500=0.13100 (USD)", REACH SVHC=Unknown, Reach SVHC Compliant=Unknown, RoHS=Yes, RoHS Compliant=Yes, Series=WL-SMCW, Stock=14062, Stock 1=100282, Supplier=Newark, Supplier 1=Digi-Key, Viewing Angle=140°, Wavelength=625nm, Width=1.25mm
MH1 MH2 MH3 MH4: "Mounting Holde", Manufacturer Part Number="UW MTHOLE"
P201: library part "CONN JACK PWR W/SW", "CONN PWR JACK 2.1X5.5MM HIGH CUR", Color=Black, Current Rating=5A, Manufacturer="CUI Inc", Manufacturer Part Number=PJ-102AH, Operating Temperature="-25°C ~ 85°C", Supplier Part Number=CP-102AH-ND, Voltage - Rated=24VDC, Connector Type=Jack, Contact Material=Copper, Contact Material - Plating=Nickel, Gender=Male, Housing Color=Black, Housing Material=Thermoplastic, Internal Switch(s)="Single Switch, Normally Closed", Mounting Type="Through Hole, Right Angle", Number of Positions/Contacts="2 Conductors, 3 Contacts", Plug/Mating Plug Diameter="2.1mm ID, 5.5mm OD", Shielding=Unshielded, Supplier=Digi-Key, Termination=Solder
Q300 Q301: "NPN General Purpose Amplifier", Current - Collector (Ic) (Max)=200mA, Current - Collector Cutoff (Max)="50nA (ICBO)", DC Current Gain (hFE) (Min) @ Ic, Vce="100 @ 10mA, 1V", Frequency - Transition=300MHz, Manufacturer="Diodes Incorporated", Manufacturer Part Number=MMBT3904-7-F, Package / Case="TO-236-3, SC-59, SOT-23-3", Power - Max=300mW, Supplier Device Package=SOT-23-3, Supplier Part Number=MMBT3904-FDICT-ND, Voltage - Collector Emitter Breakdown (Max)=40V, Category="Discrete Semiconductor Products", Mounting Type="Surface Mount", Packaging="Cut Tape (CT)", RoHS="RoHS Compliant", Supplier=Digi-Key, Transistor Type=NPN, Vce Saturation (Max) @ Ib, Ic="300mV @ 5mA, 50mA"
R200 R204: library part CMP-2000-06960-1, "Chip Resistor, 330 Ohm, +/- 1%, 125 mW, -55 to 155 degC, 0805 (2012 Metric), RoHS, Tape and Reel", Case Code (Imperial)=0805, Case Code (Metric)=2012, Manufacturer=Yageo, Manufacturer Part Number=CRCW0805330RFKEA, Max Operating Temperature=155°C, Max Power Dissipation=125mW, Min Operating Temperature=-55°C, Operating Temperature Range=-55Cto+155C, Package Description="2-Pin Surface Mounted Device, Body 2 x 1.25 mm", Package Quantity=5000, Power Rating=125mW(1/8W), Ratings=AEC-Q200, Resistance=330, Resistance Tolerance=1%, Resistor Type="Thick Film", Supplier Part Number=53K0164, Supplier Part Number 1=311-330CRCT-ND, Temperature Coefficient=100PPM/C, Voltage Rating=150V, Case Code - in=0805, Case Code - mm=2012, Case/Package=0805, Category="Chip SMD Resistors", ComponentLink1Description=https://datasheet.ciiva.com/2457/pyu-r-int-thick-7-2457015.pdf?src-supplier=Digi-Key, ComponentLink1URL=https://datasheet.ciiva.com/2457/pyu-r-int-thick-7-2457015.pdf?src-supplier=Digi-Key, ComponentLink2Description=https://datasheet.ciiva.com/2457/pyu-r-int-thick-7-2457016.pdf?src-supplier=Digi-Key, ComponentLink2URL=https://datasheet.ciiva.com/2457/pyu-r-int-thick-7-2457016.pdf?src-supplier=Digi-Key, ComponentLink3Description=https://datasheet.ciiva.com/2457/pyu-r-int-thick-7-2457014.pdf?src-supplier=Digi-Key, ComponentLink3URL=https://datasheet.ciiva.com/2457/pyu-r-int-thick-7-2457014.pdf?src-supplier=Digi-Key, ComponentLink4Description=https://datasheet.ciiva.com/12667/rc0805-12667925.pdf?src-supplier=Mouser, ComponentLink4URL=https://datasheet.ciiva.com/12667/rc0805-12667925.pdf?src-supplier=Mouser, ComponentLink5Description=https://datasheet.ciiva.com/7941/444164-7941768.pdf?src-supplier=Element14, ComponentLink5URL=https://datasheet.ciiva.com/7941/444164-7941768.pdf?src-supplier=Element14, ComponentLink6Description=https://datasheet.ciiva.com/7941/444164-7941769.pdf?src-supplier=Element14, ComponentLink6URL=https://datasheet.ciiva.com/7941/444164-7941769.pdf?src-supplier=Element14, ComponentLink7Description=https://datasheet.ciiva.com/16740/rc0805-16740975.pdf?src-supplier=Future+Electronics, ComponentLink7URL=https://datasheet.ciiva.com/16740/rc0805-16740975.pdf?src-supplier=Future+Electronics, ComponentLink8Description=https://datasheet.ciiva.com/8944/dcrcwe3-8944773.pdf?src-supplier=Avnet, ComponentLink8URL=https://datasheet.ciiva.com/8944/dcrcwe3-8944773.pdf?src-supplier=Avnet, ComponentLink9Description=https://datasheet.ciiva.com/8944/dcrcwe3-8944776.pdf?src-supplier=Avnet, ComponentLink9URL=https://datasheet.ciiva.com/8944/dcrcwe3-8944776.pdf?src-supplier=Avnet, ComponentLink10Description=https://datasheet.ciiva.com/7777/1697337-7777390.pdf?src-supplier=Element14, ComponentLink10URL=https://datasheet.ciiva.com/7777/1697337-7777390.pdf?src-supplier=Element14, ComponentLink11Description=https://datasheet.ciiva.com/16769/70201119-16769852.pdf?src-supplier=Allied+Electronics, ComponentLink11URL=https://datasheet.ciiva.com/16769/70201119-16769852.pdf?src-supplier=Allied+Electronics, Construction=Rectangular, Contact Plating=Tin, Datasheet URL=http://www.yageo.com/documents/recent/PYu-RC_Group_51_RoHS_L_7.pdf, Datasheet Version="Rev. 7, 05/2017", Depth=1.25mm, Features="Moisture Resistant", Height=0.024inch, Lead Free="Lead Free", Length=0.079inch, Manufacturer 1=Yageo, Manufacturer Part Number 1=RC0805FR-07330RL, Manufacturer URL=http://www.yageo.com/, Military Standard=Not, Mounting Technology=SurfaceMount, Number of Terminations=2, Package Reference=0805, Packaging=Reel, Pricing="1=0.02, 25=0.02, 50=0.02, 100=0.02 (USD)", Pricing 1="1=0.10000, 10=0.03700, 100=0.01510, 1000=0.00680, 2500=0.00590 (USD)", Product=ThickFilmResistorsGeneralPurpose, Reach SVHC Compliant=Unknown, RoHS=Yes, RoHS Compliant=Yes, Series=RC, Size Code=0805, Stock=218356, Stock 1=1297787, Supplier=Newark, Supplier 1=Digi-Key, Termination=SMD/SMT, Termination Style=SMD/SMT, Tolerance=1%, Voltage Rating (DC)=150V, Weight=0.000194oz, Width=0.049inch
R201 R202 R203: library part CMP-1665-00002-5, "Chip Resistor, 0 Ohm, +/- 1%, 0.125 W, -55 to 155 degC, 0805 (2012 Metric), RoHS, Tape and Reel", Case Code (Imperial)=0805, Case Code (Metric)=2012, Current Rating=2A, Manufacturer=Panasonic, Max Operating Temperature="155 degC", Max Power Dissipation=125mW, Min Operating Temperature="-55 degC", Package Quantity=5000, Ratings=AEC-Q200, Resistance="0 Ohm", Resistor Type="Thick Film", Supplier Part Number=65T8846, Temperature Coefficient=600ppm/°C, Tolerance=5%, Voltage Rating=150V, Case/Package=0805, Category="Chip SMD Resistors", ComponentLink1Description="Manufacturer URL", ComponentLink1URL=http://www.panasonic.com/, ComponentLink2Description=Datasheet, ComponentLink2URL=http://industrial.panasonic.com/cdbs/www-data/pdf/RDA0000/AOA0000C84.pdf, Construction=Rectangular, Contact Plating=Tin, DatasheetVersion=03/2015, Depth=1.25mm, Features="Automotive AEC-Q200", Height="0.6 mm", Lead Free="Lead Free", Length="2 mm", Manufacturer Part Number=ERJ-6GEY0R00V, Military Standard=Not, Mounting Technology="Surface Mount", Number of Terminations=2, PackageDescription="2-Pin Surface Mount Device, Body 2 x 1.25 mm", Packaging="Tape and Reel", PartNumber=ERJ-6GEY0R00V, Power Rating=125mW, Pricing="1=0.008, 25=0.008, 50=0.008, 100=0.008, 250=0.008, 500=0.008, 1000=0.008 (USD)", Radiation Hardening=No, REACH SVHC="No SVHC", Reach SVHC Compliant=No, RoHS=Yes, RoHS Compliant=Yes, RoHSCompliant=True, Series=ERJ, Stock=200593, Supplier=Newark, Technology="THICK FILM", Termination=SMD/SMT, Voltage Rating (DC)=150V, Width="1.25 mm"
R300 R301 R302 R303 R304 R305 R306 R307: library part CMP-26527-004489-1, "510Ω ±5% 0.125W 0805 Thick Film Chip Resistor AEC-Q200 compliant", Case Code (Imperial)=0805, Case Code (Metric)=2012, Max Operating Temperature=155°C, Max Power Dissipation=125mW, Min Operating Temperature=-55°C, Resistance=510R, Resistor Type="Thick Film", Temperature Coefficient=200ppm/°C, Tolerance=5%, Case/Package=0805, Construction=Rectangular, Contact Plating=Tin, Depth=1.25mm, Features="Automotive AEC-Q200", Height=0.026inch, Lead Free="Lead Free", Length=0.079inch, Military Standard=Not, Mount="Surface Mount", Number of Terminations=2, Packaging="Tape and Reel", Power Rating=125mW, Radiation Hardening=No, RoHS Compliant=Yes, Series=RMCF, Size Code=0805, Width=0.049inch
R308 R313 R317: library part Res3_1, "Res Thick Film 0805 1K Ohm 1% 0.125W(1/8W) ±100ppm/C Pad SMD Automotive T/R", Case Code (Imperial)=0805, Case Code (Metric)=2012, Manufacturer="Stackpole Electronics", Manufacturer Part Number=RMCF0805FT1K00, Max Operating Temperature=155°C, Max Power Dissipation=125mW, Min Operating Temperature=-55°C, Resistor Type="Thick Film", Supplier Part Number 1=RMCF0805FT1K00CT-ND, Temperature Coefficient=100ppm/°C, Tolerance=1%, Case/Package=0805, Category="Chip SMD Resistors", ComponentLink1Description=https://datasheet.ciiva.com/15193/getdatasheetpartid-360136-15193546.pdf?src-supplier=Verical, ComponentLink1URL=https://datasheet.ciiva.com/15193/getdatasheetpartid-360136-15193546.pdf?src-supplier=Verical, Construction=Rectangular, Contact Plating=Tin,Matte, Depth=1.25mm, Features="Automotive AEC-Q200", Height=0.026inch, Lead Free="Lead Free", Length=2mm, Military Standard=Not, Mounting Technology="Surface Mount", Number of Terminations=2, Packaging="Tape and Reel", Power Rating=125mW, Pricing 1="1=0.10000, 10=0.02400, 100=0.00970, 1000=0.00437, 2500=0.00379 (USD)", Radiation Hardening=No, RoHS=Yes, RoHS Compliant=Yes, Series=RMCF, Stock 1=2773085, Supplier 1=Digi-Key, Width=0.049inch
R309 R310 R311 R312 R314 R315: library part CMP-1659-00013-4, "Chip Resistor, 10 KOhm, +/- 1%, 0.125 W, -55 to 155 degC, 0805 (2012 Metric), RoHS, Tape and Reel", Case Code (Imperial)=0805, Case Code (Metric)=2012, Manufacturer=Yageo, Max Operating Temperature="155 degC", Max Power Dissipation=125mW, Min Operating Temperature="-55 degC", Package Quantity=5000, Resistance=10kR, Resistance Tolerance=1%, Resistor Type="Thick Film", Supplier Part Number=05M4535, Supplier Part Number 1=311-10.0KCRCT-ND, Temperature Coefficient=100ppm/°C, Voltage Rating="150 V", Case/Package=0805, Category="Chip SMD Resistors", ComponentLink1Description="Manufacturer URL", ComponentLink1URL=http://www.yageo.com/, ComponentLink2Description=Datasheet, ComponentLink2URL=http://www.yageo.com/documents/recent/PYu-RC_Group_51_RoHS_L_04.pdf, ComponentLink3Description=https://datasheet.ciiva.com/11808/0900766b8106beab-11808151.pdf?src-supplier=RSComponents, ComponentLink3URL=https://datasheet.ciiva.com/11808/0900766b8106beab-11808151.pdf?src-supplier=RSComponents, ComponentLink4Description=https://datasheet.ciiva.com/46447/444164-46447563.pdf?src-supplier=Element14, ComponentLink4URL=https://datasheet.ciiva.com/46447/444164-46447563.pdf?src-supplier=Element14, ComponentLink5Description=https://datasheet.ciiva.com/2456/pyu-r-int-thick-7-2456973.pdf?src-supplier=Digi-Key, ComponentLink5URL=https://datasheet.ciiva.com/2456/pyu-r-int-thick-7-2456973.pdf?src-supplier=Digi-Key, ComponentLink6Description=https://datasheet.ciiva.com/2456/pyu-r-int-thick-7-2456974.pdf?src-supplier=Digi-Key, ComponentLink6URL=https://datasheet.ciiva.com/2456/pyu-r-int-thick-7-2456974.pdf?src-supplier=Digi-Key, ComponentLink7Description=https://datasheet.ciiva.com/2456/pyu-r-int-thick-7-2456972.pdf?src-supplier=Digi-Key, ComponentLink7URL=https://datasheet.ciiva.com/2456/pyu-r-int-thick-7-2456972.pdf?src-supplier=Digi-Key, ComponentLink8Description=https://datasheet.ciiva.com/12669/rc0805-12669688.pdf?src-supplier=Mouser, ComponentLink8URL=https://datasheet.ciiva.com/12669/rc0805-12669688.pdf?src-supplier=Mouser, ComponentLink9Description=https://datasheet.ciiva.com/16747/rc0805-16747087.pdf?src-supplier=Future+Electronics, ComponentLink9URL=https://datasheet.ciiva.com/16747/rc0805-16747087.pdf?src-supplier=Future+Electronics, ComponentLink10Description=https://datasheet.ciiva.com/11808/0900766b8106beab-11808151.pdf?src-supplier=Rs, ComponentLink10URL=https://datasheet.ciiva.com/11808/0900766b8106beab-11808151.pdf?src-supplier=Rs, Construction=Rectangular, DatasheetVersion="Rev. 4, 02/2016", Depth=1.25mm, Features="Moisture Resistant", Height="0.5 mm", Lead Free="Lead Free", Length="2 mm", Manufacturer 1=Yageo, Manufacturer Part Number=RC0805FR-0710KL, Manufacturer Part Number 1=RC0805FR-0710KL, Military Standard=Not, Mount="Surface Mount", Mounting Technology="Surface Mount", Number of Terminations=2, PackageDescription="2-Pin Surface Mounted Device, Body 2 x 1.25 mm", PackageReference=0805, Packaging="Tape and Reel", Pins=2, Power Rating=125mW, Pricing="1=0.102, 10=0.035, 25=0.028, 50=0.021, 100=0.014 (USD)", Pricing 1="1=0.10000, 10=0.03800, 100=0.01560, 1000=0.00702, 2500=0.00610 (USD)", REACH SVHC="No SVHC", Reach SVHC Compliant=Unknown, RoHS=Yes, RoHS Compliant=Yes, RoHSCompliant=true, Series=RC, Size Code=0805, Stock=346650, Stock 1=5682818, Supplier=Newark, Supplier 1=Digi-Key, Technology="THICK FILM", Termination=SMD/SMT, Tolerance=1%, Width=0.049inch
R316: library part Res3, "Res Thick Film 0805 10K Ohm 1% 0.125W ±100ppm/°C Molded SMD Paper T/R", Case Code (Imperial)=0805, Case Code (Metric)=2012, Manufacturer="Stackpole Electronics", Manufacturer Part Number=RMCF0805FT10K0, Max Operating Temperature=155°C, Max Power Dissipation=125mW, Min Operating Temperature=-55°C, Resistor Type="Thick Film", Supplier Part Number 1=RMCF0805FT10K0CT-ND, Temperature Coefficient=100ppm/°C, Tolerance=1%, Case/Package=0805, Category="Chip SMD Resistors", ComponentLink1Description=https://datasheet.ciiva.com/15193/getdatasheetpartid-362046-15193525.pdf?src-supplier=Verical, ComponentLink1URL=https://datasheet.ciiva.com/15193/getdatasheetpartid-362046-15193525.pdf?src-supplier=Verical, Construction=Rectangular, Contact Plating=Tin,Matte, Depth=1.25mm, Features="Automotive AEC-Q200", Height=0.026inch, Lead Free="Lead Free", Length=2mm, Military Standard=Not, Mounting Technology="Surface Mount", Number of Terminations=2, Packaging="Tape and Reel", Power Rating=125mW, Pricing 1="1=0.10000, 10=0.02400, 100=0.00970, 1000=0.00437, 2500=0.00379 (USD)", Radiation Hardening=No, RoHS=Yes, RoHS Compliant=Yes, Series=RMCF, Stock 1=3732463, Supplier 1=Digi-Key, Width=0.049inch
U1: "Bucky Badger Image", Manufacturer Part Number="UW Bucky"
U300: "No Description Available", Mfr_Name=TDK, Copyright="Copyright (C) 2023 Ultra Librarian. All rights reserved.", Manufacturer_Part_Number=PS1440P02BT, RefDes=RefDes, Type=DEV
U301: library part CMP-04886-000003-2, "IC I/O EXPANDER I2C 8B 16TSSOP", Case/Package=TSSOP, Frequency=400kHz, Manufacturer 1="Texas Instruments", Max Operating Temperature=85°C, Min Operating Temperature=-40°C, Supplier Part Number 1=296-40574-1-ND, Category="Interface ICs", ComponentLink1Description=https://datasheet.ciiva.com/48508/tca9534-48508117.pdf?src-supplier=Avnet, ComponentLink1URL=https://datasheet.ciiva.com/48508/tca9534-48508117.pdf?src-supplier=Avnet, Interface=I2C, Lead Free="Lead Free", Manufacturer Part Number 1=TCA9534PWR, Mount="Surface Mount", Number of I/Os=8, Number of Outputs=8, Number of Pins=16, Packaging="Tape and Reel", Pricing 1="1=1.45000, 10=1.29500, 25=1.22880, 100=1.00930, 250=0.94352, 500=0.83380, 1000=0.66240 (USD)", RoHS=Yes, RoHS Compliant=Yes, Stock 1=63981, Supplier 1=Digi-Key

## Via types
v1: diameter 23.62, hole 11.81, Top Layer to Bottom Layer, 57 vias

## Nets (pads, with @x,y where several pads share a name; then routed paths per layer and width w, separated by ;. In a path a pad name is that pad's centre, name@x,y a point inside that pad or via, vN(x,y) a via of type N, cw(c..) or ccw(c..) an arc to the next point about the centre after c; other vN are vias at no path point)
3.3_LED_OUT: LED3.3.1 R200.1 | length 237.9
  Top Layer w12: R200.1 1692.91,398.33 LED3.3.1@1697.36,393.88
3.3V: 3.3V.1 C300.1 J200.1 LED3.3.2 R308.2 R309.2 R310.2 R311.2 R312.2 U300.1 U301.16
12V: 12V.1 D300.1 J201.5 K300.2 K300.3 LED12.2 P201.1
BUZZ_OUT: Q300.3 R308.1 U300.2 | length 979.6
  Top Layer w12: U300.2 3543.31,2362.2 3543.31,1850.39 v1(3543.31,1721.08) ; v1(3738.59,1726.4) 3738.59,1809.46 R308.1
  Bottom Layer w12: v1(3543.31,1721.08) 3730.13,1721.08 3735.45,1726.4 v1(3738.59,1726.4)
BUZZ_SEL: Q300.1 R313.2 | length 361.5
  Top Layer w12: R313.2 3228.92,1890.33 v1(3228.92,1950) ; Q300.1@3450,1893.61 3455.81,1887.8 Q300.1 v1(3457.68,1950)
  Bottom Layer w12: v1(3228.92,1950) v1(3457.68,1950)
BUZZER: BUZZ.1 R313.1 U301.6 | length 1883.9
  Top Layer w12: U301.6 v1(1901.02,2085.63) ; v1(2992.13,2125.98) BUZZ.1 2992.13,1736.02 3000,1728.14 v1(3000,1725) ; v1(3225,1725) 3225,1807.68 R313.1
  Bottom Layer w12: v1(1901.02,2085.63) 2282.48,2085.63 2322.83,2125.98 v1(2992.13,2125.98) ; v1(3000,1725) v1(3225,1725)
GND: C300.2 GND.1 J200.4 J200.5 J300.1 LED300.1 LED301.1 LED302.1 LED303.1 LED304.1 LED305.1 LED306.1 LED307.1 P201.2 P201.3 Q300.2 Q301.2 R200.2 R204.2 R314.1 R315.1 R316.2 U301.8 | length 2743.6
  Top Layer w12: LED300.1 279.53,2641.73 LED301.1 LED302.1 LED303.1@625.98,2641.73 ; LED303.1 v1(629.92,2700) ; GND.1@945.51,1141.73 v1(945.51,1275) ; LED304.1 1139.76,2639.76 LED305.1 1143.7,2639.76 LED306.1 LED307.1@1375.98,2639.76 ; J200.5 1033.44,331.62 1033.44,361.62 J200.4 1027.74,431.48 1027.74,447.78 v1(1025.51,450) ; v1(1375,2700) 1375,2644.68 LED307.1 ; v1(1625,700) 1625,696.86 1629.92,691.93 R200.2 ; C300.2 1735.83,1792.31 1750,1778.14 v1(1750,1775) ; U301.8 1886.23,2136.81 1899.42,2150 v1(1901.02,2150) ; R316.2 2088.58,750 v1(2173.46,750) ; Q301.2 2237.2,840.94 2250,828.14 v1(2250,825) ; R314.1 R315.1 2443.7,2050 v1(2500,2050) ; GND.1@2795.28,2322.83 2795.28,2232.87 2800,2228.14 v1(2800,2225) ; v1(2925,625) 2925,621.86 2929.13,617.72 R204.2 ; v1(3125,250) 3127.22,247.78 3127.22,229.91 3163,194.13 P201.3 ; v1(3450,1750) 3450,1753.14 3457.68,1760.82 Q300.2
  Bottom Layer w12: v1(629.92,2700) v1(1375,2700)
INT: R203.2 R312.1 U301.13 | length 1364.5
  Top Layer w12: R203.2 R312.1 794.29,1692.91 827.85,1726.47 v1(827.85,2034.64) ; v1(1542.17,2034.64) 1542.26,2034.54 1622.92,2034.54 U301.13
  Bottom Layer w12: v1(827.85,2034.64) v1(1542.17,2034.64)
INT_MCU: INT.1 J200.6 R203.1 | length 1105.7
  Top Layer w12: R203.1 INT.1 787.4,591.81 J200.6
IO_A0: R309.1 U301.1 | length 635.8
  Top Layer w12: v1(1841.55,1850.39) U301.1 ; v1(2320.16,1850.39) R309.1
  Bottom Layer w12: v1(1841.55,1850.39) v1(2320.16,1850.39)
IO_A1: R314.2 U301.2 | length 544.1
  Top Layer w12: U301.2 1900.93,1983.27 1901.02,1983.17 1968.41,1983.17 v1(1968.5,1983.27) ; v1(2320.16,1953.34) 2323.31,1953.34 2330.78,1945.87 R314.2
  Bottom Layer w12: v1(1968.5,1983.27) 1998.43,1953.34 v1(2320.16,1953.34)
IO_A2: R315.2 U301.3 | length 549.4
  Top Layer w12: U301.3 v1(1929.13,2008.86) ; v1(2322.83,2007.87) 2325.06,2010.1 2339.82,2010.1 2370.08,2040.35 R315.2
  Bottom Layer w12: v1(1929.13,2008.86) 1957.77,2008.86 1957.86,2008.95 1979.14,2008.95 1979.24,2008.86 2321.85,2008.86 v1(2322.83,2007.87)
LED1: LED300.2 R304.2 | length 114.2
  Top Layer w12: R304.2 LED300.2
LED2: LED301.2 R300.2 | length 118.1
  Top Layer w12: R300.2 LED301.2
LED3: LED302.2 R305.2 | length 116.1
  Top Layer w12: R305.2 LED302.2
LED4: LED303.2 R301.2 | length 114.2
  Top Layer w12: R301.2 LED303.2
LED5: LED304.2 R302.2 | length 116.1
  Top Layer w12: R302.2 LED304.2
LED6: LED305.2 R306.2 | length 114.2
  Top Layer w12: R306.2 LED305.2
LED7: LED306.2 R303.2 | length 112.2
  Top Layer w12: R303.2 LED306.2
LED8: LED307.2 R307.2 | length 118.1
  Top Layer w12: R307.2 LED307.2
LED_SET1: R300.1 R301.1 R302.1 R303.1 U301.5 | length 2145.5
  Top Layer w12: v1(393.53,2295.63) 393.53,2299.23 393.7,2299.4 R300.1 ; v1(629.92,2295.63) R301.1 ; v1(1023.62,2296.35) R302.1 ; v1(1259.84,2295.63) R303.1 ; U301.5 1890.29,2060.04 1890.38,2059.94 1911.66,2059.94 1911.76,2060.04 1929.13,2060.04 1951.62,2082.53 v1(1951.62,2296.35)
  Bottom Layer w12: v1(393.53,2295.63) v1(629.92,2295.63) v1(1259.84,2295.63) 1950.9,2295.63 v1(1951.62,2296.35)
LED_SET2: R304.1 R305.1 R306.1 R307.1 U301.4 | length 2509.3
  Top Layer w12: v1@275.59,2264.02 R304.1 ; v1(511.81,2263.98) R305.1 ; v1(1141.73,2264.02) R306.1 ; v1(1377.95,2263.98) R307.1 ; U301.4 1918.4,2034.45 1918.49,2034.54 1939.77,2034.54 1939.87,2034.45 2002.14,2034.45 2009.17,2041.48 v1(2009.17,2263.26)
  Bottom Layer w12: v1(275.56,2263.98) v1(511.81,2263.98) v1(1377.95,2263.98) 2008.45,2263.98 v1(2009.17,2263.26)
NetLED12_1: LED12.1 R204.1 | length 196.9
  Top Layer w12: LED12.1 R204.1
PMP_SEL: Q301.1 R316.1 R317.2 | length 313
  Top Layer w12: R316.1 R317.2 Q301.1@2244.09,982.28
Pump: PUMP300.1 R317.1 U301.9 | length 1993.3
  Top Layer w12: v1(1450,1150) v1(1450,2136.81) ; v1(1550,2136.81) U301.9 ; R317.1 2086.61,1135.24 2075,1146.86 v1(2075,1150) 2075,1248.23 PUMP300.1
  Bottom Layer w12: v1(1450,1150) v1(2075,1150) ; v1(1450,2136.81) v1(1550,2136.81)
PUMP_PWR: J300.2 K300.1 PUMP_PWR.1 | length 803.1
  Top Layer w12: K300.1 v1(3274.02,1200) ; PUMP_PWR.1 3650,1366.54 v1(3650,1200) 3650,1116.93 J300.2 J300.2@3700.79,1082.45
  Bottom Layer w12: v1(3274.02,1200) v1(3650,1200)
RLY_CL_OUT: D300.2 K300.5 Q301.3 | length 843.6
  Top Layer w12: Q301.3@2322.83,944.88 2323.46,944.25 v1(2323.46,775) ; v1(2599.68,775) D300.2 ; v1(2825,775) 2825,776.38 2874.02,825.39 K300.5
  Bottom Layer w12: v1(2323.46,775) v1(2599.68,775) v1(2825,775)
SCL: R201.2 R311.1 U301.14 | length 856.8
  Top Layer w12: R201.2 R311.1 1266.73,1692.91 1300.29,1726.47 1300.29,2008.57 v1(1300,2008.86) ; v1(1500,2008.86) 1535.35,2008.86 1535.45,2008.95 1622.92,2008.95 U301.14
  Bottom Layer w12: v1(1300,2008.86) v1(1300,2008.86) 1499.95,2008.91 v1(1500,2008.86)
SCL_MCU: J200.2 R201.1 SCL.1 | length 1070.2
  Top Layer w12: J200.2@1145.9,394.59 1146.41,394.59 1259.84,508.03 SCL.1 R201.1
SDA: R202.2 R310.1 U301.15 | length 987.2
  Top Layer w12: R202.2 R310.1 1109.25,1692.91 1155.31,1738.98 v1(1155.31,1982.24) ; v1(1546.08,1983.27) U301.15
  Bottom Layer w12: v1(1155.31,1982.24) 1155.83,1982.75 1545.57,1982.75 v1(1546.08,1983.27) v1@1544.64,1984.71
SDA_MCU: J200.3 R202.1 SDA.1 | length 1489.4
  Top Layer w12: v1(1100,450) 1100,863.78 SDA.1 ; SDA.1@1102.36,869.67 R202.1 ; v1(1105.51,257.73) J200.3 ; v1(1249.71,450) 1249.85,449.85 1249.85,323.85 v1(1250,323.7)
  Bottom Layer w12: v1(1100,450) v1(1249.71,450) ; v1(1105.51,257.73) 1193.89,257.73 1230.81,294.65 1230.81,301.36 1250,320.56 v1(1250,323.7)
pads on no net: J200. J200.7 J200.8 J201. J201.1 J201.2 J201.3 J201.4 J201.6 J201.7 J201.8 K300.4 K300.6 MH1.1 MH2.1 MH3.1 MH4.1 U301.7 U301.10 U301.11 U301.12

## Polygon pours and split planes (outlines as drawn)
3.3V on Top Layer "3.3V_L01_P008" (solid, pour order 8): 551.18,118.11 1811.02,118.11 1811.02,1692.91 3858.27,1692.91 3858.27,2480.32 3267.72,2480.32 3267.72,2047.24 3228.35,2007.87 551.18,2007.87
12V on Top Layer "12V_L01_P009" (solid, pour order 9): 1929.13,0 3937.01,0 3937.01,1574.8 1929.13,1574.8
GND on Bottom Layer "B_GND" (hatched 45Degree grid 50 track 10, remove dead copper, pour order 7): -39.37,3976.38 3976.38,3976.38 3976.38,-39.37 -78.74,-39.37

## Keep-outs
Keep-Out Layer:
  the board outline again, w10

## Silkscreen, mask and mechanical layers (free items; w line width, h text height)
Top Overlay:
  text "Group 4" at 2057.24,3665.37 h100
  text "aleX-ES" at 2057.24,3395.83 h100
Mechanical 2:
  lines w10: 196.85,0 cw(c196.85,196.85) 0,196.85 0,3740.16 cw(c196.85,3740.16) 196.85,3937.01 3740.16,3937.01 cw(c3740.16,3740.16) 3937.01,3740.16 3937.01,196.85 cw(c3740.16,196.85) 3740.16,0 196.85,0 ; 196.85,0 196.85,0

## Text inside footprints (layer, text, board x,y; h text height)
U1: Top Overlay "ECE 453" at 2252.2,2657.17 h40